# Altium PCB RX.PcbDoc (part 1 of 2)
Units mil, origin at the board's own origin, x right, y up, seen from the top; angles counter-clockwise.
Board outline 2899 x 930 mil, 4 copper layers (Top Layer, Int1 (GND), Int2 (PWR), Bottom Layer), stack 53.912 mil thick; 154 components, 91 nets, 472 pads, 94 vias.
Unrouted connection lines stored in the file: 29.
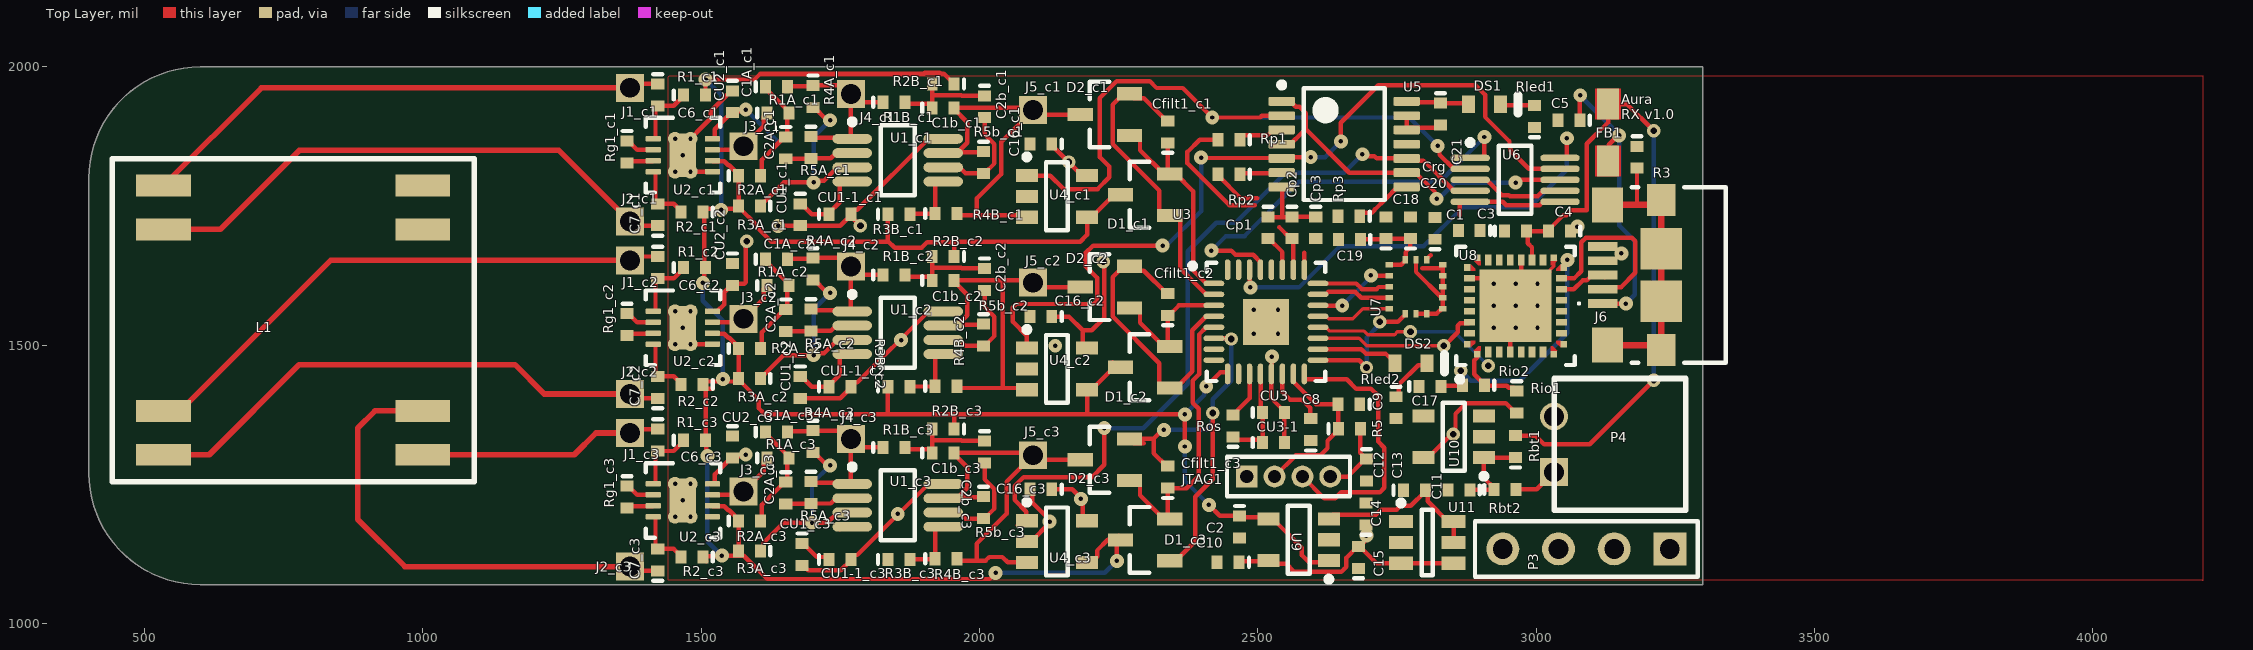
[diagram p0: Top Layer view]
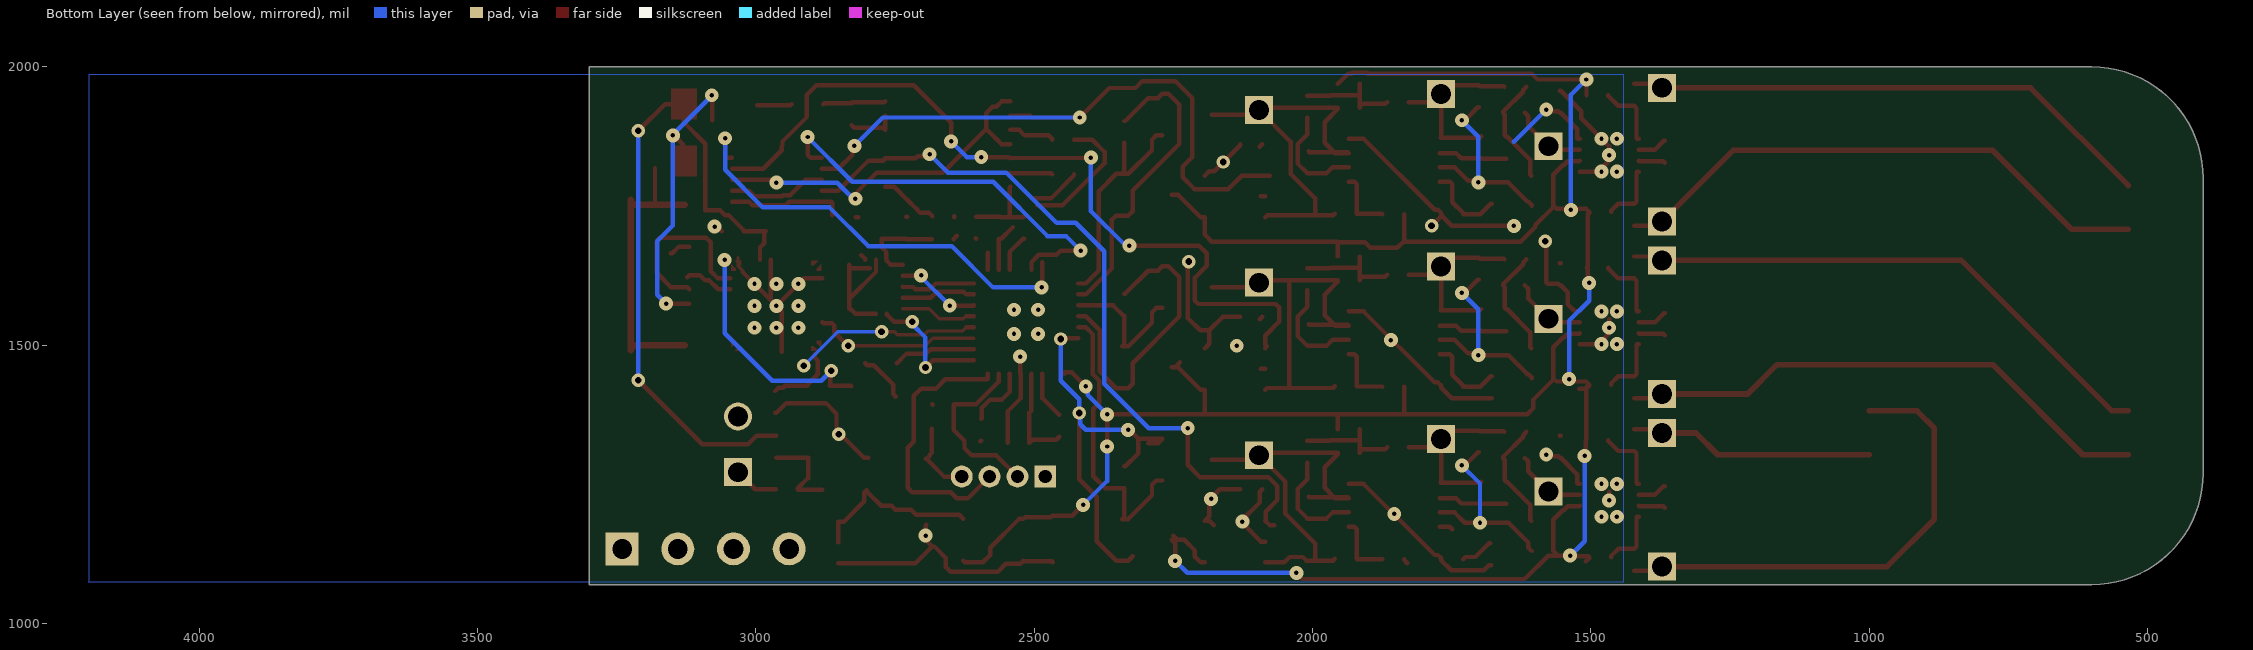
[diagram p1: Bottom Layer view, seen from below]
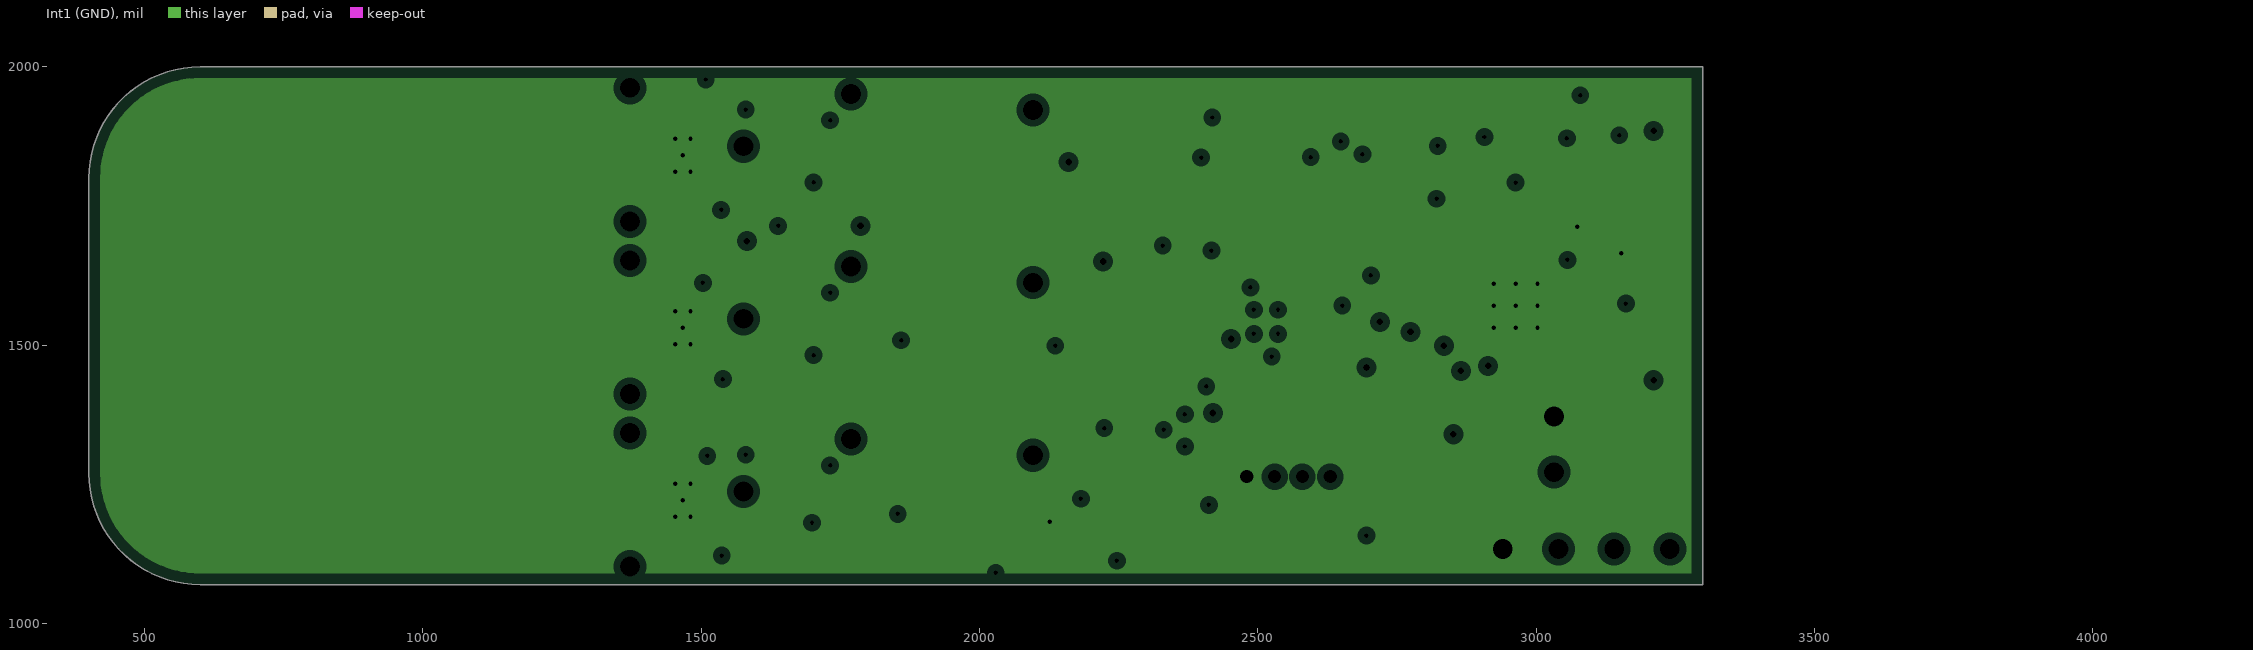
[diagram p2: Int1 (GND), clearances drawn from the general rule]
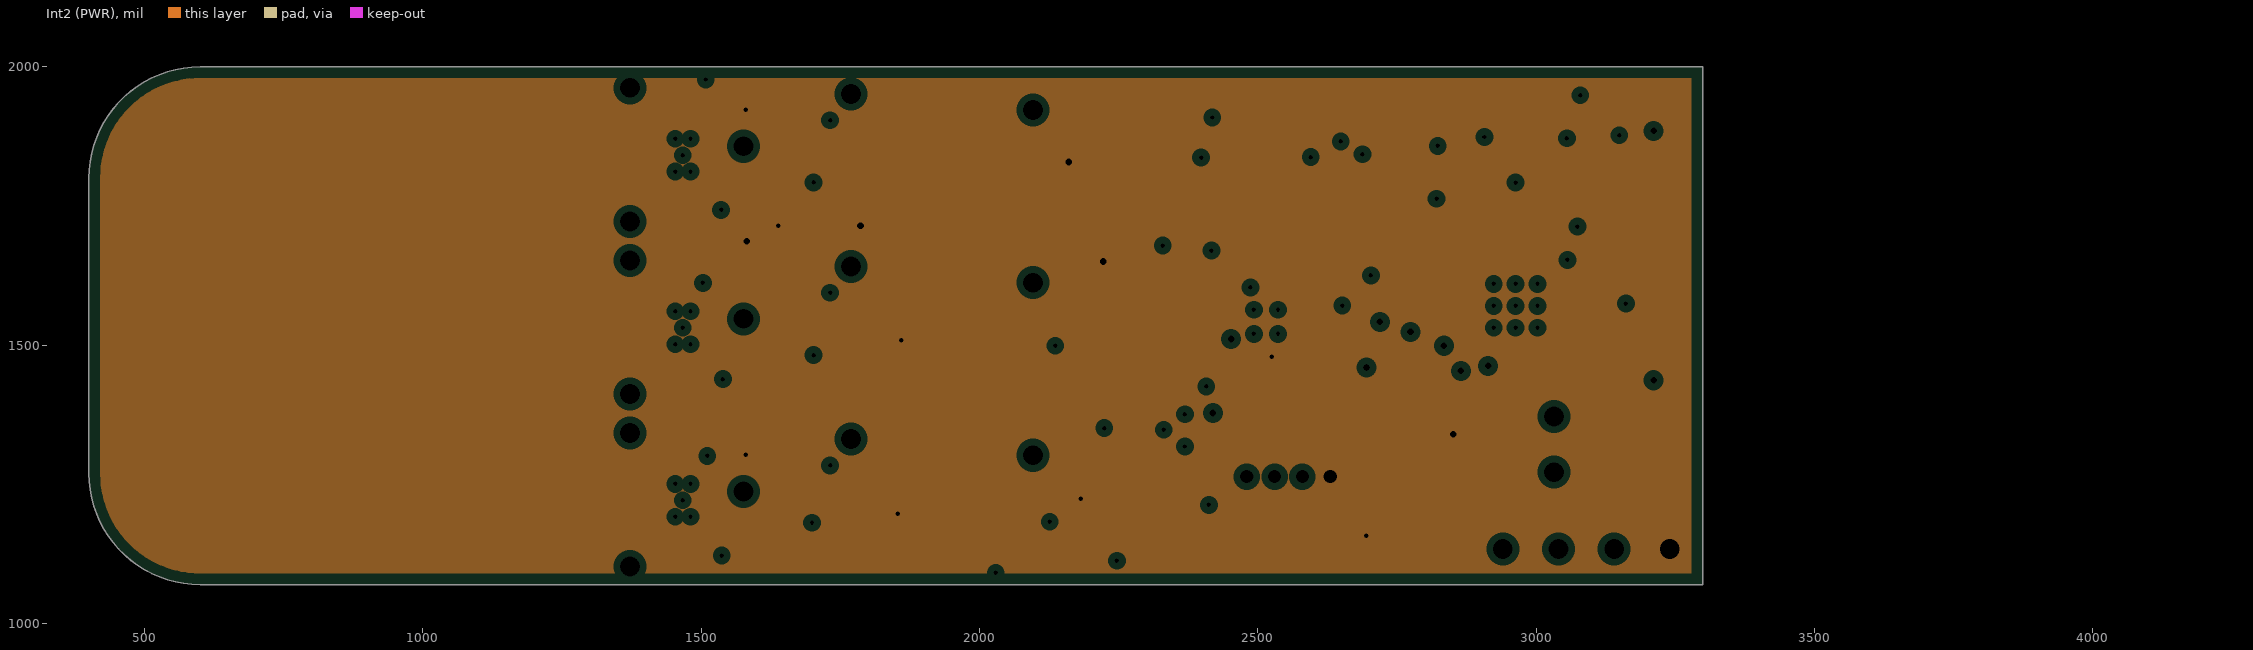
[diagram p3: Int2 (PWR), clearances drawn from the general rule]

## Layer stack, top to bottom
Top Solder: solder mask 1, SM-001, Dk 4
Top Layer: signal copper 1.3779
Dielectric 1: prepreg 5.1, PP-017, Dk 4.3
Dielectric 2: prepreg 5.1, PP-017, Dk 4.3
Int1 (GND): plane copper 1.3779, net GND
Dielectric 3: core 28, Core-039, Dk 4.8
Int2 (PWR): plane copper 1.3779, net VCC
Dielectric 4: prepreg 5.1, PP-017, Dk 4.3
Dielectric 5: prepreg 5.1, PP-017, Dk 4.3
Bottom Layer: signal copper 1.3779
Bottom Solder: solder mask 1, SM-001, Dk 4

## Board outline
600,1070 cw(c600,1270) 400,1270 400,1800 cw(c600,1800) 600,2000 3299,2000 3299,1070

## Design rules (kind name [scope] priority, off if disabled: settings)
Clearance Clearance~FusionPCB [All] p1: gap=8 ignorepadtopadclearanceinfootprint=FALSE except(4: Arc-Arc Arc-Track Arc-SMDPad Arc-THPad Arc-Text Arc-Hole Track-Track Track-SMDPad Track-THPad Track-Text Track-Hole SMDPad-SMDPad SMDPad-THPad SMDPad-Text SMDPad-Hole THPad-THPad THPad-Text THPad-Hole Via-Text Via-Hole Fill-Text Fill-Hole Poly-Text Poly-Hole Region-Text Region-Hole Text-Text Text-Hole) // Sunstone Circuits Minimum Clearance Rule (Double Sided)
HoleSize HoleSize~FusionPCB [All] p1: absolutevalues=TRUE maxlimit=248.03 minlimit=7.87 maxpercent=80.000 minpercent=20.000 // SSC Hole Size Rule For Single Sided & Double Sided Designs.
HoleSize Testpoint [All] p2: absolutevalues=TRUE maxlimit=100 minlimit=1 maxpercent=80.000 minpercent=20.000
HoleSize TestPointUsage [All] p3: absolutevalues=TRUE maxlimit=100 minlimit=1 maxpercent=80.000 minpercent=20.000
MinimumAnnularRing MinimumAnnularRing~FusionPCB [All] p1: minimumring=5 // Sunstone Circuits Minimum Annular Ring (Double Sided)
MinimumSolderMaskSliver [All] p1: minsoldermaskwidth=4
PlaneClearance "PlaneClearance~Sunstone Circuits" [All] p1: clearance=12 // Sunstone Circuits Power Plane Clearance Rule (Double Sided)
PlaneConnect "PlaneConnect~Sunstone Circuits" [All] p1: planeconnectstyle=Relief reliefexpansion=10 reliefentries=4 reliefconductorwidth=8 reliefairgap=10 // Sunstone Circuits Power Plane Connect Rule (Double Sided)
PolygonConnect "PolygonConnect~Sunstone Circuits" [All] p1: connectstyle=Relief reliefconductorwidth=8 reliefentries=4 polygonreliefangle="90 Angle" airgapwidth=10 // Sunstone Circuits Polygon Connect Style (Double Sided)
RoomDefinition c2 [InComponentClass('c2')] p1: confinementstyle=ConfineIn formatcopy=TRUE lockcomponents=FALSE outline 1340,1380 2382,1380 2382,1690 1340,1690
RoomDefinition c3 [InComponentClass('c3')] p2: confinementstyle=ConfineIn formatcopy=TRUE lockcomponents=FALSE outline 1340,1071 2382,1071 2382,1380 1340,1380
RoomDefinition c1 [InComponentClass('c1')] p3: confinementstyle=ConfineIn formatcopy=TRUE lockcomponents=FALSE outline 1340,1690 2382,1690 2382,2000 1340,2000
RoutingVias RoutingVias~FusionPCB [All] p1: holewidth=12 width=24 viastyle="Through Hole" minholewidth=12 minwidth=24 maxholewidth=20 maxwidth=40 // Sunstone Circuits Routing Vias Rule (Double Sided)
ShortCircuit "ShortCircuit~Sunstone Circuits" [All] p1: allowed=FALSE // Sunstone Circuits Short Circuit Rule~Do Not Allow (Double Sided)
SolderMaskExpansion "SolderMaskExpansion~Sunstone Circuits" [All] p1: expansion=3 // Sunstone Circuits Solder Mask Expansion Rule (Double Sided)
ViasUnderSMD "ViasUnderSMD~Sunstone Circuits" [All] p1: allowed=FALSE // Sunstone Circuits Vias Under SMD~Do Not Allow (Double Sided)
Width Width~FusionPCB [All] p1: maxlimit=8 minlimit=6 preferedwidth=8 minimp=50.000000 maximp=50.000000 favimp=50.000000 // Sunstone Circuits Minimum Width Rule (Double Sided)
25 further rules are at their usual default settings.

## Classes and differential pairs
component class U_ble: P3
component class U_usb: C3 C4 C5 C17 FB1 R3 Rio1 Rio2 U8
component class U_power: C2 C10 C11 C12 C13 C14 C15 DS1 P4 Rbt1 Rbt2 Rled1 U9 U10 U11
component class U_mcu: C8 C9 Cp1 Cp2 Cp3 CU3 CU3-1 DS2 JTAG1 R5 Rled2 Ros Rp1 Rp2 Rp3 U3
component class U_imu: C18 C19 C20 Crg U7
component class U_coil_processing: C1 C21 L1 U5 U6
component class c1: C1A_c1 C1b_c1 C2A_c1 C2b_c1 C5_c1 C6_c1 C7_c1 C16_c1 Cbp1_c1 Cfilt1_c1 CU1-1_c1 CU1_c1 CU2_c1 D1_c1 D2_c1 J1_c1 J2_c1 J3_c1 J4_c1 J5_c1 R1_c1 R1A_c1 R1B_c1 R2_c1 R2A_c1 R2B_c1 R3A_c1 R3B_c1 R4A_c1 R4B_c1 R5A_c1 R5b_c1 Rbp1_c1 Rbp2_c1 Rbp7_c1 Rg1_c1 Rxor2_c1 U1_c1 U2_c1 U4_c1
component class c2: C1A_c2 C1b_c2 C2A_c2 C2b_c2 C5_c2 C6_c2 C7_c2 C16_c2 Cbp1_c2 Cfilt1_c2 CU1-1_c2 CU1_c2 CU2_c2 D1_c2 D2_c2 J1_c2 J2_c2 J3_c2 J4_c2 J5_c2 R1_c2 R1A_c2 R1B_c2 R2_c2 R2A_c2 R2B_c2 R3A_c2 R3B_c2 R4A_c2 R4B_c2 R5A_c2 R5b_c2 Rbp1_c2 Rbp2_c2 Rbp7_c2 Rg1_c2 Rxor2_c2 U1_c2 U2_c2 U4_c2
component class c3: C1A_c3 C1b_c3 C2A_c3 C2b_c3 C5_c3 C6_c3 C7_c3 C16_c3 Cbp1_c3 Cfilt1_c3 CU1-1_c3 CU1_c3 CU2_c3 D1_c3 D2_c3 J1_c3 J2_c3 J3_c3 J4_c3 J5_c3 R1_c3 R1A_c3 R1B_c3 R2_c3 R2A_c3 R2B_c3 R3A_c3 R3B_c3 R4A_c3 R4B_c3 R5A_c3 R5b_c3 Rbp1_c3 Rbp2_c3 Rbp7_c3 Rg1_c3 Rxor2_c3 U1_c3 U2_c3 U4_c3
channel class coils: c1 c2 c3

## Components (designator, comment, footprint, x,y, rotation, side; value= is the part's Value field where it differs from the comment)
C1 "Cap" 0402 2879.69,1706 r180 top value=0.1uF
C1A_c1 "Cap" 0402 1635.31,1964.32 r0 top value=180p (schematic designator C1A)
C1A_c2 "Cap" 0402 1635.31,1654.32 r0 top value=180p (schematic designator C1A)
C1A_c3 "Cap" 0402 1635.31,1344.32 r0 top value=180p (schematic designator C1A)
C1b_c1 "Cap" 0402 1934.69,1926.32 r0 top value=160p (schematic designator C1b)
C1b_c2 "Cap" 0402 1934.69,1616.32 r0 top value=160p (schematic designator C1b)
C1b_c3 "Cap" 0402 1934.69,1306.32 r0 top value=160p (schematic designator C1b)
C2 "Cap" 0402 2467,1173.69 r270 top value=0.1uF
C2A_c1 "Cap" 0402 1652,1854.63 r270 top value=180p (schematic designator C2A)
C2A_c2 "Cap" 0402 1652,1544.63 r270 top value=180p (schematic designator C2A)
C2A_c3 "Cap" 0402 1652,1234.63 r270 top value=180p (schematic designator C2A)
C2b_c1 "Cap" 0402 2009,1928.32 r270 top value=160p (schematic designator C2b)
C2b_c2 "Cap" 0402 2009,1618.32 r270 top value=160p (schematic designator C2b)
C2b_c3 "Cap" 0402 2009,1308.32 r270 top value=160p (schematic designator C2b)
C3 "Cap" 0402 2962.68,1705 r0 top value=100nF
C4 "Cap" 0402 3041.69,1705 r180 top value=4.7uF
C5 "Cap" 0402 3058.69,1904.06 r180 top value=10uF
C6_c1 "Cap" 0402 1422,1949.63 r270 top value=1nF (schematic designator C6)
C6_c2 "Cap" 0402 1422,1639.63 r270 top value=1nF (schematic designator C6)
C6_c3 "Cap" 0402 1422,1329.63 r270 top value=1nF (schematic designator C6)
C7_c1 "Cap" 0402 1422,1734.32 r90 top value=1nF (schematic designator C7)
C7_c2 "Cap" 0402 1422,1424.32 r90 top value=1nF (schematic designator C7)
C7_c3 "Cap" 0402 1422,1114.32 r90 top value=1nF (schematic designator C7)
C8 "Cap" 0402 2595,1348.31 r90 top value=470nF
C9 "Cap" 0402 2663.32,1394 r180 top value=1nF
C10 "Cap" 0402 2446.55,1110 r180 top value=0.1uF
C11 "Cap" 0402 2861,1240 r180 top value=1uF
C12 "Cap" 0402 2695,1276 r270 top value=1uF
C13 "Cap" 0402 2781,1239.31 r0 top value=0.1uF
C14 "Cap" 0402 2694,1197 r90 top value=1uF
C15 "Cap" 0402 2681,1118.68 r90 top value=0.1uF
C16_c1 "Cap" 0402 2110,1861.32 r180 top value=0.1uF (schematic designator C16)
C16_c2 "Cap" 0402 2110,1551.32 r180 top value=0.1uF (schematic designator C16)
C16_c3 "Cap" 0402 2110,1241.32 r180 top value=0.1uF (schematic designator C16)
C17 "Cap" 0402 2809,1426 r0 top value=100nF
C18 "Cap" 0402 2730,1711 r90 top value=0.1uF
C19 "Cap" 0402 2664.32,1690 r180 top value=2.2uF
C20 "Cap" 0402 2774,1711 r90 top value=.01uF
C21 "Cap" 0402 2828,1915 r270 top value=0.1uF
Cfilt1_c1 "Cap" 0402 2338,1883 r90 top value=470pF (schematic designator Cfilt1)
Cfilt1_c2 "Cap" 0402 2338,1573 r90 top value=470pF (schematic designator Cfilt1)
Cfilt1_c3 "Cap" 0402 2338,1263 r90 top value=470pF (schematic designator Cfilt1)
Cp1 "Cap" 0402 2518,1711 r270 top value=100pF
Cp2 "Cap" 0402 2561,1711 r270 top value=100pF
Cp3 "Cap" 0402 2604,1711 r270 top value=100pF
Crg "Cap" 0402 2818.11,1710 r90 top value=0.1uF
CU1-1_c1 "Cap" 0402 1749,1735.32 r0 top value=10uF (schematic designator CU1-1)
CU1-1_c2 "Cap" 0402 1749,1425.32 r0 top value=10uF (schematic designator CU1-1)
CU1-1_c3 "Cap" 0402 1749,1115.32 r0 top value=10uF (schematic designator CU1-1)
CU1_c1 "Cap" 0402 1678,1734.32 r270 top value=0.1uF (schematic designator CU1)
CU1_c2 "Cap" 0402 1678,1424.32 r270 top value=0.1uF (schematic designator CU1)
CU1_c3 "Cap" 0402 1681,1124.32 r270 top value=0.1uF (schematic designator CU1)
CU2_c1 "Cap" 0402 1556,1937.32 r270 top value=0.1uF (schematic designator CU2)
CU2_c2 "Cap" 0402 1556,1627.32 r270 top value=0.1uF (schematic designator CU2)
CU2_c3 "Cap" 0402 1556,1317.32 r270 top value=0.1uF (schematic designator CU2)
CU3 "Cap" 0402 2528,1379 r0 top value=0.1uF
CU3-1 "Cap" 0402 2528,1325 r0 top value=10uF
D1_c1 "SMS7630-006LF" SOT23-3N 2345.45,1537.27 r180 top (schematic designator D1)
D1_c2 "SMS7630-006LF" SOT23-3N 2345.45,1227.27 r180 top (schematic designator D1)
D1_c3 "SMS7630-006LF" SOT23-3N 2345.45,917.27 r180 top (schematic designator D1)
D2_c1 "SMS7630-005LF" SOT23-3N 2273.45,1681.27 r180 top (schematic designator D2)
D2_c2 "SMS7630-005LF" SOT23-3N 2273.45,1371.27 r180 top (schematic designator D2)
D2_c3 "SMS7630-005LF" SOT23-3N 2273.45,1061.27 r180 top (schematic designator D2)
DS1 "TLMS1100-GS08" VISH-TLMX1100_V 2907,1933 r0 top
DS2 "TLMS1100-GS08" VISH-TLMX1100_V 2775,1467.79 r0 top
FB1 "BLM21PG300SN1D" MURA-BLM21-B40-CHIP-2_V2 3129,1882 r270 top
J1_c1 "Socket" pin1 1372,1962.32 r0 top (schematic designator J1)
J1_c2 "Socket" pin1 1372,1652.32 r0 top (schematic designator J1)
J1_c3 "Socket" pin1 1372,1342.32 r0 top (schematic designator J1)
J2_c1 "Socket" pin1 1372,1722.32 r0 top (schematic designator J2)
J2_c2 "Socket" pin1 1372,1412.32 r0 top (schematic designator J2)
J2_c3 "Socket" pin1 1372,1102.32 r0 top (schematic designator J2)
J3_c1 "Socket" pin1 1576,1857.32 r0 top (schematic designator J3)
J3_c2 "Socket" pin1 1576,1547.32 r0 top (schematic designator J3)
J3_c3 "Socket" pin1 1576,1237.32 r0 top (schematic designator J3)
J4_c1 "Socket" pin1 1769,1951.32 r0 top (schematic designator J4)
J4_c2 "Socket" pin1 1769,1641.32 r0 top (schematic designator J4)
J4_c3 "Socket" pin1 1769,1331.32 r0 top (schematic designator J4)
J5_c1 "Socket" pin1 2096,1922.32 r0 top (schematic designator J5)
J5_c2 "Socket" pin1 2096,1612.32 r0 top (schematic designator J5)
J5_c3 "Socket" pin1 2096,1302.32 r0 top (schematic designator J5)
J6 "1981568-1" TECO-1981568-5_V 3119.14,1626.02 r90 top
JTAG1 "MHDR1X4" MHDR1X4 2480,1264 r0 top
L1 "3DCC08-A" 3DCC08-A 767,1545 r90 top
P3 "Header 4" HDR1X4 3240,1134 r180 top
P4 "JST-PH-small" JST-PH-small 3032,1322 r0 top
R1_c1 "Res" 0402 1488,1949.32 r0 top value=332k (schematic designator R1)
R1_c2 "Res" 0402 1488,1639.32 r0 top value=332k (schematic designator R1)
R1_c3 "Res" 0402 1488,1329.32 r0 top value=332k (schematic designator R1)
R1A_c1 "Res" 0402 1638,1917.32 r0 top value=16.5k (schematic designator R1A)
R1A_c2 "Res" 0402 1638,1607.32 r0 top value=16.5k (schematic designator R1A)
R1A_c3 "Res" 0402 1638,1297.32 r0 top value=16.5k (schematic designator R1A)
R1B_c1 "Res" 0402 1846.31,1936.32 r0 top value=24.9K (schematic designator R1B)
R1B_c2 "Res" 0402 1846.31,1626.32 r0 top value=24.9K (schematic designator R1B)
R1B_c3 "Res" 0402 1846.31,1316.32 r0 top value=24.9K (schematic designator R1B)
R2_c1 "Res" 0402 1483.32,1739.32 r180 top value=332k (schematic designator R2)
R2_c2 "Res" 0402 1483.32,1429.32 r180 top value=332k (schematic designator R2)
R2_c3 "Res" 0402 1483.32,1119.32 r180 top value=332k (schematic designator R2)
R2A_c1 "Res" 0402 1587,1804.32 r0 top value=866 (schematic designator R2A)
R2A_c2 "Res" 0402 1587,1494.32 r0 top value=866 (schematic designator R2A)
R2A_c3 "Res" 0402 1587,1184.32 r0 top value=866 (schematic designator R2A)
R2B_c1 "Res" 0402 1934.69,1969.32 r180 top value=1.05K (schematic designator R2B)
R2B_c2 "Res" 0402 1934.69,1659.32 r180 top value=1.05K (schematic designator R2B)
R2B_c3 "Res" 0402 1934.69,1349.32 r180 top value=1.05K (schematic designator R2B)
R3 "Res" 0402 3181,1837.63 r270 top value=DNC
R3A_c1 "Res" 0402 1586.69,1750.32 r180 top value=316 (schematic designator R3A)
R3A_c2 "Res" 0402 1586.69,1440.32 r180 top value=316 (schematic designator R3A)
R3A_c3 "Res" 0402 1586.69,1130.32 r180 top value=316 (schematic designator R3A)
R3B_c1 "Res" 0402 1855,1735.32 r0 top value=191 (schematic designator R3B)
R3B_c2 "Res" 0402 1855,1425.32 r0 top value=191 (schematic designator R3B)
R3B_c3 "Res" 0402 1855,1115.32 r0 top value=191 (schematic designator R3B)
R4A_c1 "Res" 0402 1701,1947 r270 top value=18.2k (schematic designator R4A)
R4A_c2 "Res" 0402 1701,1637 r270 top value=18.2k (schematic designator R4A)
R4A_c3 "Res" 0402 1701,1327 r270 top value=18.2k (schematic designator R4A)
R4B_c1 "Res" 0402 1940,1736.32 r0 top value=11K (schematic designator R4B)
R4B_c2 "Res" 0402 1940,1426.32 r0 top value=11K (schematic designator R4B)
R4B_c3 "Res" 0402 1940,1116.32 r0 top value=11K (schematic designator R4B)
R5 "Res" 0402 2664.32,1350 r0 top value=47k
R5A_c1 "Res" 0402 1697,1855.32 r270 top value=82.5k (schematic designator R5A)
R5A_c2 "Res" 0402 1697,1545.32 r270 top value=82.5k (schematic designator R5A)
R5A_c3 "Res" 0402 1697,1235.32 r270 top value=82.5k (schematic designator R5A)
R5b_c1 "Res" 0402 2007,1828.32 r270 top value=100K (schematic designator R5b)
R5b_c2 "Res" 0402 2007,1518.32 r270 top value=100K (schematic designator R5b)
R5b_c3 "Res" 0402 2007,1208.32 r270 top value=100K (schematic designator R5b)
Rbt1 "Res" 0402 2963,1317.68 r90 top value=0
Rbt2 "Res" 0402 2944,1241 r0 top value=DNP
Rg1_c1 "Res" 0402 1367,1847.32 r270 top value=1k (schematic designator Rg1)
Rg1_c2 "Res" 0402 1367,1537.32 r270 top value=1k (schematic designator Rg1)
Rg1_c3 "Res" 0402 1367,1227.32 r270 top value=1k (schematic designator Rg1)
Rio1 "Res" 0402 2965,1398 r270 top value=0
Rio2 "Res" 0402 2887,1428 r180 top value=DNP
Rled1 "Res" 0402 2997,1911 r90 top value=60
Rled2 "Res" 0402 2748.28,1387.69 r270 top value=60
Ros "Res" 0402 2455,1355 r90 top value=20k
Rp1 "Res" 0402 2448,1869 r180 top value=1k
Rp2 "Res" 0402 2448,1807 r180 top value=1k
Rp3 "Res" 0402 2663.32,1731.63 r180 top value=1k
U1_c1 "AD8616ARMZ" ADI-RM-8_N 1853,1832.32 r0 top (schematic designator U1)
U1_c2 "AD8616ARMZ" ADI-RM-8_N 1853,1522.32 r0 top (schematic designator U1)
U1_c3 "AD8616ARMZ" ADI-RM-8_N 1853,1212.32 r0 top (schematic designator U1)
U2_c1 "INA826AIDRGT" DRG0008A_V 1467,1841.32 r0 top (schematic designator U2)
U2_c2 "INA826AIDRGT" DRG0008A_V 1467,1531.32 r0 top (schematic designator U2)
U2_c3 "INA826AIDRGT" DRG0008A_V 1467,1221.32 r0 top (schematic designator U2)
U3 "MSP430I2031TRHB" QFN50P500X500X100_HS-33N 2514.5,1541.95 r0 top
U4_c1 "TLV3201-Q1" SOT95P280X145-5N 2139,1767.32 r0 top (schematic designator U4)
U4_c2 "TLV3201-Q1" SOT95P280X145-5N 2139,1457.32 r0 top (schematic designator U4)
U4_c3 "TLV3201-Q1" SOT95P280X145-5N 2139,1147.32 r0 top (schematic designator U4)
U5 "SN74LV86APWR" PW0014A_L 2655,1861.16 r0 top
U6 "ADG704BRMZ" ADI-RM-10_N 2962,1797 r0 top
U7 "ICM-20602" INSE-I62-16 2784,1605 r0 top
U8 "FT232RQ-Reel" PQFN5X5-32_V 2962.9,1570.67 r90 top
U9 "ADA4084-1ARJZ-R7" SOT95P280X145-5N 2573.24,1150.52 r180 top
U10 "TPS70933" SOT95P280X145-5N 2851.87,1335.4 r180 top
U11 "ADR3412ARJZ-R2" ADI-RJ-6_N 2804.24,1145.6 r0 top

## Footprints (in the part's own frame and the unit in brackets; to place one, negate y for a bottom-side part, rotate by r counter-clockwise, add the part's x,y. Pads: shape width x height; smd on the part's side, far side on the other; paste and mask are expansions set on the pad)
3DCC08-A [mm] "premo coil"
  rect 1x2.5 smd: 1(6.14,5.91) 2(4.14,5.91) 3(-4.14,5.91) 4(-6.14,5.91) 5(-6.14,-5.91) 6(-4.14,-5.91) 7(4.14,-5.91) 8(6.14,-5.91)
  silkscreen extent -7.37,-8.25 7.37,8.25
0402 [mm] "Surface Mount; Body 1 x 0.5 mm (LxW typ)"
  rect 0.5x0.6 smd: 1(-0.5,0) 2(0.5,0)
  silkscreen extent -0.95,-0.2 -0.95,0.2, body extent -0.5,-0.25 0.5,0.25, height 0.5
ADI-RJ-6_N [mm] "SOT23, 6-Leads, Body 2.9x1.6mm, Pitch 0.95mm, IPC Medium Density"
  rect 1.1x0.6 smd: 1(-1.2,0.95) 2(-1.2,0) 3(-1.2,-0.95) 4(1.2,-0.95) 5(1.2,0) 6(1.2,0.95)
  silkscreen extent -1.32,-1.5 0.25,1.92, body extent -0.85,-1.5 0.85,1.5, height 1.45
ADI-RM-8_N [mm] "SOP, 8-Leads, Body 3x3mm, Pitch 0.65mm, IPC Medium Density"
  oval 1.8x0.45 smd: 1(-2.075,0.975) 2(-2.075,0.325) 3(-2.075,-0.325) 4(-2.075,-0.975) 5(2.075,-0.975) 6(2.075,-0.325) 7(2.075,0.325) 8(2.075,0.975)
  silkscreen extent -2.2,-1.6 0.77,1.87, body extent -1.6,-1.6 1.6,1.6, height 1.1
ADI-RM-10_N [mm] "SOP, 10-Leads, Body 3x3mm, Pitch 0.5mm, IPC Medium Density"
  oval 1.8x0.3 smd: 1(-2.05,1) 2(-2.05,0.5) 3(-2.05,0) 4(-2.05,-0.5) 5(-2.05,-1) 6(2.05,-1) 7(2.05,-0.5) 8(2.05,0) 9(2.05,0.5) 10(2.05,1)
  silkscreen extent -2.17,-1.55 0.75,1.82, body extent -1.55,-1.55 1.55,1.55, height 1.1
DRG0008A_V [mm] "SON, 8-Leads, Body 3x3mm, Pitch 0.5mm, Thermal Pad 2x1.2mm, TI Recommended"
  rrect40% 0.7x0.25 smd: 1(-1.35,0.75) 2(-1.35,0.25) 3(-1.35,-0.25) 4(-1.35,-0.75) 5(1.35,-0.75) 6(1.35,-0.25) 7(1.35,0.25) 8(1.35,0.75)
  rrect8% 1.2x2 smd paste-0.6: 9(0,0)
  Drill Guide keep-out region: 0.6,-1 -0.6,-1 -0.6,-1.3 0.6,-1.3
  Drill Guide keep-out region: -0.6,1 0.6,1 0.6,1.3 -0.6,1.3
  silkscreen extent -1.7,-1.7 1.7,1.7, body extent -1.55,-1.55 1.55,1.55, height 0.81
HDR1X4 [mm] "Connector; Header; 4 Position"
  rect 1.5x1.5 hole 0.9: 1(0,0)
  round 1.5 hole 0.9: 2(2.54,0) 3(5.08,0) 4(7.62,0)
  silkscreen extent -1.27,-1.27 8.89,1.27
INSE-I62-16 [mm] "LGA, 16-Leads, Body 3x3mm, Pitch 0.5mm"
  rect 0.35x0.25 smd: 1(-1.225,1) 2(-1.225,0.5) 3(-1.225,0) 4(-1.225,-0.5) 5(-1.225,-1) 9(1.225,-1) 10(1.225,-0.5) 11(1.225,0) 12(1.225,0.5) 13(1.225,1)
  rect 0.25x0.35 smd: 6(-0.5,-1.225) 7(0,-1.225) 8(0.5,-1.225) 14(0.5,1.225) 15(0,1.225) 16(-0.5,1.225)
  body extent -1.5,-1.5 1.5,1.5, height 0.8
JST-PH-small [mm]
  rect 1.271x1.271 hole 0.9: 1(0,-1.27)
  oval 1.271x1.271 hole 0.9: 2(0,1.27)
  silkscreen extent 0,-3 6,3
MHDR1X4 [mm] "Connector; Header; 4 Position"
  rect 1x1 hole 0.6: 1(0,0)
  round 1 hole 0.6: 2(1.27,0) 3(2.54,0) 4(3.81,0)
  silkscreen extent -0.9,-0.9 4.71,0.9
MURA-BLM21-B40-CHIP-2_V2 [mm] "Chip Ferrite Bead, 2-Leads, Body 2x1.25mm, Height 1.05mm, 35um Land Pad Thickness, 3 to 4A Rated Current"
  rect 1.4x1 smd mask+0: 1(-1.3,0) 2(1.3,0)
  Top Layer region: -2,-0.599 -0.6,-0.599 -0.6,0.601 -2,0.601
  Top Layer region: 0.6,-0.599 2,-0.599 2,0.601 0.6,0.601
  body extent -1,-0.63 1,0.63, height 1.05
pin1 [mm]
  rect 1.271x1.271 hole 0.9: 1(0,0)
PQFN5X5-32_V [mm] "QFN, 32-Leads, Body 5x5mm, Pitch 0.5mm, Thermal Pad 3.3x3.3mm, FTDI Recommended"
  rect 0.3x0.3 smd paste-0.15 mask-0.15: 1(-2.2,1.75) 8(-2.2,-1.75) 9(-1.75,-2.2) 16(1.75,-2.2) 17(2.2,-1.75) 24(2.2,1.75) 25(1.75,2.2) 32(-1.75,2.2)
  rect 0.5x0.3 smd paste-0.15 mask+0.06: 2(-2.1,1.25) 3(-2.1,0.75) 4(-2.1,0.25) 5(-2.1,-0.25) 6(-2.1,-0.75) 7(-2.1,-1.25) 18(2.1,-1.25) 19(2.1,-0.75) 20(2.1,-0.25) 21(2.1,0.25) 22(2.1,0.75) 23(2.1,1.25)
  rect 0.3x0.5 smd paste-0.15 mask+0.06: 10(-1.25,-2.1) 11(-0.75,-2.1) 12(-0.25,-2.1) 13(0.25,-2.1) 14(0.75,-2.1) 15(1.25,-2.1) 26(1.25,2.1) 27(0.75,2.1) 28(0.25,2.1) 29(-0.25,2.1) 30(-0.75,2.1) 31(-1.25,2.1)
  rect 3.3x3.3 smd paste-1.65 mask+0.06: 33(0,0)
  Top Layer region: -2.05,-1.6 -1.85,-1.6 -1.85,-1.7 -2.05,-1.9
  Top Layer region: 2.05,-1.6 1.85,-1.6 1.85,-1.7 2.05,-1.9
  Top Layer region: 2.05,1.6 1.85,1.6 1.85,1.7 2.05,1.9
  Top Layer region: -2.05,1.6 -1.85,1.6 -1.85,1.7 -2.05,1.9
  Top Layer region: -1.6,-2.05 -1.6,-1.85 -1.7,-1.85 -1.9,-2.05
  Top Layer region: 1.6,2.05 1.6,1.85 1.7,1.85 1.9,2.05
  Top Layer region: -1.6,2.05 -1.6,1.85 -1.7,1.85 -1.9,2.05
  Top Layer region: 1.6,-1.85 1.6,-2.05 1.9,-2.05 1.7,-1.85
  silkscreen extent -3.47,-2.7 2.7,2.7, body extent -2.55,-2.55 2.55,2.55, height 1
PW0014A_L [mm] "SOP, 14-Leads, Body 5.1x4.5mm, Pitch 0.65mm, IPC High Density"
  rrect25% 1.2x0.4 smd: 1(-2.85,1.95) 2(-2.85,1.3) 3(-2.85,0.65) 4(-2.85,0) 5(-2.85,-0.65) 6(-2.85,-1.3) 7(-2.85,-1.95) 8(2.85,-1.95) 9(2.85,-1.3) 10(2.85,-0.65) 11(2.85,0) 12(2.85,0.65) 13(2.85,1.3) 14(2.85,1.95)
  silkscreen extent -2.97,-2.55 1.85,2.82, body extent -3.21,-2.5 3.21,2.5, height 1
QFN50P500X500X100_HS-33N [mm] "QFN, 32-Leads, Body 5.00x5.00mm, Pitch 0.50mm, Thermal Pad 2.10x2.10mm, IPC Medium Density"
  oval 0.95x0.25 smd: 1(-2.375,1.75) 2(-2.375,1.25) 3(-2.375,0.75) 4(-2.375,0.25) 5(-2.375,-0.25) 6(-2.375,-0.75) 7(-2.375,-1.25) 8(-2.375,-1.75) 17(2.375,-1.75) 18(2.375,-1.25) 19(2.375,-0.75) 20(2.375,-0.25) 21(2.375,0.25) 22(2.375,0.75) 23(2.375,1.25) 24(2.375,1.75)
  oval 0.25x0.95 smd: 9(-1.75,-2.375) 10(-1.25,-2.375) 11(-0.75,-2.375) 12(-0.25,-2.375) 13(0.25,-2.375) 14(0.75,-2.375) 15(1.25,-2.375) 16(1.75,-2.375) 25(1.75,2.375) 26(1.25,2.375) 27(0.75,2.375) 28(0.25,2.375) 29(-0.25,2.375) 30(-0.75,2.375) 31(-1.25,2.375) 32(-1.75,2.375)
  rect 2.1x2.1 smd: 33(0,0)
  silkscreen extent -3.47,-2.7 2.7,2.7, body extent -2.6,-2.6 2.6,2.6, height 1
SOT23-3N [mm] "SMS7621"
  rect 1.15x0.6 smd: 1(0.098,-4.969) 2(0.098,-6.869) 3(2.348,-5.919)
  silkscreen extent 1.02,-7.42 1.92,-4.42, body extent 0.52,-7.42 1.92,-4.42, height 1.1
SOT95P280X145-5N [mm] "SOT23, 5-Leads, Body 2.90x2.80mm, Pitch 0.95mm, IPC Medium Density"
  rect 1x0.6 smd: 1(-1.375,0.95) 2(-1.375,0) 3(-1.375,-0.95) 4(1.375,-0.95) 5(1.375,0.95)
  silkscreen extent -1.5,-1.55 0.5,1.92, body extent -1.5,-1.53 1.5,1.53, height 1.45
TECO-1981568-5_V [mm] "SMD, 5-Leads, Body 8x5.9mm, Pitch 0.65mm"
  rect 0.4x1.35 smd: 1(-1.3,0) 2(-0.65,0) 3(0,0) 4(0.65,0) 5(1.3,0)
  rect 1.6x1.4 smd: 6(-3.2,-0.225) 7(3.2,-0.225)
  rect 1.45x1.3 smd: 8(-3.425,-2.675) 9(3.425,-2.675)
  rect 1.9x1.9 smd: 10(-1.2,-2.675) 11(1.2,-2.675)
  silkscreen extent -4,-5.63 4,1.12, body extent -4,-5.63 4,0.28, height 3
VISH-TLMX1100_V [mm] "SMD, 2-Leads, Body 1.6x0.8mm"
  rect 0.6x0.8 smd: 1(-0.725,0) 2(0.725,0)
  silkscreen extent 1.53,-0.4 1.53,0.4, body extent -0.8,-0.4 0.8,0.4, height 0.65

## Part data
C1 C1A_c1 C1A_c2 C1A_c3 C1b_c1 C1b_c2 C1b_c3 C2 C2A_c1 C2A_c2 C2A_c3 C2b_c1 C2b_c2 C2b_c3 C3 C4 C5 C6_c1 C6_c2 C6_c3 C7_c1 C7_c2 C7_c3 C8 C9 C10 C11 C12 C13 C14 C15 C16_c1 C16_c2 C16_c3 C17 C18 C19 C20 C21 Cfilt1_c1 Cfilt1_c2 Cfilt1_c3 Cp1 Cp2 Cp3 Crg CU1-1_c1 CU1-1_c2 CU1-1_c3 CU1_c1 CU1_c2 CU1_c3 CU2_c1 CU2_c2 CU2_c3 CU3 CU3-1: "Ceramic Capacitor (Surface Mount)", Manufacturer="Generic Ceramic Chip Cap (TBD)"
D1_c1 D1_c2 D1_c3: library part SMS7621-006LF, Supplier Part Number 1=863-1124-6-ND, Supplier 1=Digi-Key
D2_c1 D2_c2 D2_c3: library part SMS7621-005LF, Supplier Part Number 1=863-1699-6-ND, Supplier 1=Digi-Key
DS1 DS2: library part CMP-1666-00027-1, "LED, RED, 2.1 V, -40 to 100 degC, 2-Pin SMD (0603), RoHS, Tape and Reel", Capacitance="12 pF", Case/Package=0603, Case Code (Metric)=1608, Max Operating Temperature=125degC, Min Operating Temperature=-55degC, Package Quantity=4000, Resistance="100000000000 Ohm", Tolerance=5%, Type (Capacitors)=C0G, Voltage Rating="50 V", Case Code (Imperial)=0603, ComponentLink1Description="Manufacturer URL", ComponentLink1URL=http://www.vishay.com/, ComponentLink2Description=Datasheet, ComponentLink2URL=http://www.vishay.com/docs/83173/tlmb1100.pdf, DatasheetVersion="Rev. 2.7, 03/2016", Height="0.8 mm", Length="1.6 mm", Mount="Surface Mount", PackageDescription="2-Pin Surface Mount Device, Body 1.6 x 0.8 mm", PackageReference=TLMX1100, Packaging="Tape and Reel", Pins=2, Radiation Hardening=No, REACH SVHC="No SVHC", RoHSCompliant=True, Voltage Rating (DC)="50 V", Width="0.8 mm"
FB1: library part CMP-0686-00620-2, "Chip Ferrite Bead for Power Lines, 30 Ohm, 4000 mA, -55 to 125 degC, 2 x 1.25 x 1.05 mm SMD, Tape and Reel", DC Resistance="0.014 Ohm Max.", Manufacturer=Murata, Operating Temperature Range="-55 to 125 degC", Rated Current="4000 mA", ComponentLink1Description="Manufacturer URL", ComponentLink1URL=http://www.murata.com/, ComponentLink2Description=Datasheet, ComponentLink2URL=http://www.murata.com/products/catalog/pdf/c31e.pdf, ComponentLink3Description="Package Specification", ComponentLink3URL=http://www.murata.com/products/catalog/pdf/c31e.pdf, DatasheetVersion=08/2013, Impedance (at 100 MHz)="30 Ohm Typ.", Mounting Technology="Surface Mount", PackageDescription="2-Pin Chip, Body 2 x 1.25 mm", PackageReference=BLM21_H1050-2, Packing="Tape and Reel", PartNumber=BLM21PG300SN1D
J6: library part CMP-2000-05408-1, "Micro USB Receptacle Standard Type B Assy, 5-Pin SMD, RoHS, Tape and Reel", Current Rating (Max)=1/ContactA, Manufacturer="TE Connectivity", Operating Temperature Max Deg. C=85C, Operating Temperature Min Deg. C=-55C, Operating Temp Range=-55Cto85C, Voltage Rating Max=30VAC, Body Orientation=RightAngle, Contact Material=CopperAlloy, Contact Plating=GoldOverNickel, Datasheet URL=http://www.mouser.com/ds/2/418/NG_CD_1981568_E2-621296.pdf, Datasheet Version="Rev. E2, 08/2015", Gender=RCP, Housing Material=Thermoplastic, Manufacturer URL=http://www.te.com/, Mounting Style=SurfaceMount, Number of Contacts=5POS, Number of Ports=1Port, Number of Terminals=5, Packaging=TapeandReel, Pitch (mm)=0.65mm, Product Depth (mm)=5.6mm, Product Height (mm)=3mm, Product Length (mm)=8mm, Termination Method=Solder, Type=MicroUSB
JTAG1: "Header, 4-Pin", Supplier Part Number 1=ED90528-ND, LatestRevisionDate=17-Jul-2002, LatestRevisionNote="Re-released for DXP Platform.", Publisher="Altium Limited", Supplier 1=Digi-Key
P3: "Header, 4-Pin", LatestRevisionDate=17-Jul-2002, LatestRevisionNote="Re-released for DXP Platform.", Publisher="Altium Limited"
R1_c1 R1_c2 R1_c3 R1A_c1 R1A_c2 R1A_c3 R1B_c1 R1B_c2 R1B_c3 R2_c1 R2_c2 R2_c3 R2A_c1 R2A_c2 R2A_c3 R2B_c1 R2B_c2 R2B_c3 R3 R3A_c1 R3A_c2 R3A_c3 R3B_c1 R3B_c2 R3B_c3 R4A_c1 R4A_c2 R4A_c3 R4B_c1 R4B_c2 R4B_c3 R5 R5A_c1 R5A_c2 R5A_c3 R5b_c1 R5b_c2 R5b_c3 Rbt1 Rbt2 Rg1_c1 Rg1_c2 Rg1_c3 Rio1 Rio2 Rled1 Rled2 Ros Rp1 Rp2 Rp3: "Chip Resistor (Surface Mount)", Manufacturer="Generic Chip Res (TBD)"
U1_c1 U1_c2 U1_c3: library part CMP-0384-01709-1, "Double Channel Wide Bandwidth Operational Amplifier, 24 MHz BW, 12 V/us SR, Industrial, 8-pin SOP (RM-8), Tube", Amplifiers Per Package=2, Generic Part Number=AD8616, Input Bias Current=200fA, Input Offset Voltage=23uV, Manufacturer="Analog Devices", Code_JEDEC=MO-187-AA, ComponentLink1Description="Manufacturer URL", ComponentLink1URL=http://www.analog.com/en/index.html, ComponentLink2Description=Datasheet, ComponentLink2URL=http://www.analog.com/static/imported-files/data_sheets/AD8615_8616_8618.pdf, ComponentLink3Description="Package Specification", ComponentLink3URL=http://www.analog.com/static/imported-files/packages/PKG_PDF/MSOP%28RM%29/RM_8.pdf, DatasheetVersion="Rev. E", Iq/Amp=2mA, Mounting Technology="Surface Mount", PackageDescription="8-Pin Mini Small Outline Package, Body 3 x 3 mm, Pitch 0.65 mm", PackageReference=RM-8, PartId=1, PartNumber=AD8616ARMZ, Slew Rate=12V/us, Small Signal Bandwidth=24MHz, V Span Max=6V, V Span Min=2.7V
U2_c1 U2_c2 U2_c3: library part CMP-0944-00099-2, "Precision, 200-uA Supply Current, 36-V Supply Instrumentation Amplifier, -40 to 125 degC, 8-pin SON (DRG8), Green (RoHS & no Sb/Br)", Input Bias Current (+/-)(Max)(nA)=65, Manufacturer="Texas Instruments", Quiescent Current (+/-)(Typ)(mA)=0.2, CMRR(Min)(dB)=84, Code_JEDEC=MO-229, ComponentLink1Description="Manufacturer URL", ComponentLink1URL=http://www.ti.com/, ComponentLink2Description=Datasheet, ComponentLink2URL=http://www.ti.com/general/docs/lit/getliterature.tsp?genericPartNumber=INA826&fileType=pdf, ComponentLink3Description="Package Specification", ComponentLink3URL=http://www.ti.com/litv/pdf/mpds151b, DatasheetVersion=SBOS562E, Eco-Plan="Green (RoHS & no Sb/Br)", Gain(V/V)="1 to 1000", Input Offset (+/-)(Max)(uV)=150, Input Offset Drift (+/-)(Max)(uV/Degrees Celsius)=2, Mounting Technology="Surface Mount", Noise at 1kHz(Typ)(nV/rt(Hz))=18, Non-Linearity (+/-)(Max)(%)=0.0005, Number of Channels=1, Output Offset (+/-)(Max)(uV)=700, Output Offset Drift (+/-)(Max)(uV/Degrees Celsius)=10, PackageDescription="8-Pin Plastic Small Outline, Body 3 x 3 mm, Pitch 0.5 mm", PackageReference=DRG0008A, PackageVersion="4205379/C, 12/2010", PartNumber=INA826AIDRGT, SubFamily="Single Supply", Vs(Max)(V)=36, Vs(Min)(V)=2.7
U4_c1 U4_c2 U4_c3: "40-ns, Micropower Comparator", Supplier Part Number 1=296-36750-1-ND, Supplier 1=Digi-Key
U5: library part CMP-0778-00149-3, "Quadruple 2-Input Exclusive-OR Gates, PW0014A, LARGE T&R", F @ Nom Voltage(Max)(Mhz)=70, Generic Part Number=SN74LV86A, ICC @ Nom Voltage(Max)(mA)=0.02, Manufacturer="Texas Instruments", Operating Temperature Range(C)="-40 to 125,-40 to 85", Rating=Catalog, tpd @ Nom Voltage(Max)(ns)=21,13,8, Voltage(Nom)(V)=2.5,3.3,5, Bits(#)=4, DatasheetVersion=SCLS392G, Input Type=TTL, Output Drive (IOL/IOH)(Max)(mA)=50/-50, Output Type=TTL, PackageReference=PW0014A, Schmitt Trigger=No, Technology Family=LV-A, VCC(Max)(V)=5.5, VCC(Min)(V)=2
U6: library part CMP-0798-00103-1, "CMOS Low Voltage 4 Ohm, 4-Channel Multiplexer, -40 to 85 degC, 10-pin SOP (RM-10), Tube", Manufacturer="Analog Devices", Bandwidth (Hz)=200M, Code_JEDEC=MO-187-BA, ComponentLink1Description="Manufacturer URL", ComponentLink1URL=http://www.analog.com/en/index.html, ComponentLink2Description=Datasheet, ComponentLink2URL=http://www.analog.com/static/imported-files/data_sheets/ADG704.pdf, ComponentLink3Description="Package Specification", ComponentLink3URL=http://www.analog.com/static/imported-files/packages/PKG_PDF/MSOP%28RM%29/RM_10.pdf, DatasheetVersion="Rev. A", Max Analog Signal Range="0 to Vdd", Mounting Technology="Surface Mount", PackageDescription="10-Pin Mini Small Outline Package, Body 3 x 3 mm, Pitch 0.5 mm", PackageReference=RM-10, PackageVersion=Aug-05, Packing=Tube, PartNumber=ADG704BRMZ, Ron (ohms)=4, Supply V Guar Performance="Single_(+3.3V), Single_(+3V), Single_(+5V)"
U7: library part CMP-2000-07589-1, "High Performance 6-Axis MEMS MotionTracking(TM) Device, 1.71 to 3.45 V, -40 to 85 degC, 16-Pin LGA, RoHS", Manufacturer=InvenSense, Max Operating Temperature=85degC, Min Operating Temperature=-40degC, Package Description="16-Pin Land Grid Array, Body 3 x 3 mm, Pitch 0.5 mm", Package Reference=I62-16, Supplier Part Number 1=1428-1060-1-ND, Datasheet URL=http://www.invensense.com/wp-content/uploads/2016/10/DS-000176-ICM-20602-v1.0.pdf, Datasheet Version="Rev. 1.0, 10/2016", Manufacturer URL=http://www.invensense.com/, Mounting Technology=SurfaceMount, Output Type=I2C, RoHSCompliant=True, Sensor Type=Temperature, Supplier 1=Digi-Key
U8: library part CMP-0078-00009-3, "USB UART Asynchronous Serial Data Transfer Chip, 32-pin QFN, Tape and Reel", Manufacturer=FTDI, ComponentLink1Description="Manufacturer URL", ComponentLink1URL=http://www.ftdichip.com/, ComponentLink2Description=Datasheet, ComponentLink2URL=http://www.ftdichip.com/Support/Documents/DataSheets/ICs/DS_FT232R.pdf, DatasheetVersion="ver 2.10, Mar-2012", PackageDescription="32-Pin Quad Flat No-Lead 0.5 mm Pitch, Pullback, 3.2 x 3.2 mm Exposed Pad", PackageReference=PQFN5X5-32, PackageVersion=Mar-12, PartNumber=FT232RQ-Reel, RevisionNote="DatasheetVersion updated to 2.10 Mar-2012"
U9: library part ADA4622-1ARJZ, "30 V, 8 MHz, Low Bias Current, / Single-Supply, RRO, Precision Op Amps", Supplier Part Number 1=ADA4084-1ARJZ-R7CT-ND, ComponentLink1Description=Datasheet, ComponentLink1URL=http://www.analog.com/media/en/technical-documentation/data-sheets/ada4622-1-4622-2-4622-4.pdf, Supplier 1=Digi-Key
U10: "3.3V Ultra low power Voltage Regulator", Supplier Part Number 1=296-39474-1-ND, Supplier 1=Digi-Key
U11: library part CMP-0784-00363-1, "Micropower, High Accuracy Voltage Reference, 1.2 V Output, 2.3 to 5.5 V Supply, Industrial, 6-pin SOT23 (RJ-6), Reel", Manufacturer="Analog Devices", Operating Temp Range="-40 to 125 degC", Code_JEDEC=MO-178-AB, ComponentLink1Description="Manufacturer URL", ComponentLink1URL=http://www.analog.com/en/index.html, ComponentLink2Description=Datasheet, ComponentLink2URL=http://www.analog.com/static/imported-files/data_sheets/ADR3412_ADR3420_ADR3425_ADR3430_ADR3433_ADR3440_ADR3450.pdf, ComponentLink3Description="Package Specification", ComponentLink3URL=http://www.analog.com/static/imported-files/packages/PKG_PDF/SOT-23(RJ)/RJ_6.pdf, ComponentLink4Description="URL Link1", ComponentLink4URL="Product URL:http://www.analog.com/en/special-linear-functions/voltage-references/adr3412/products/product.html", DatasheetVersion="Rev. B", Max V Supply (V)=5.5, Min V Supply (V)=2.3, Mounting Technology="Surface Mount", PackageDescription="6-Pin Small Outline Transistor Package, Body 2.9 x 1.6 mm, Pitch 0.95 mm", PackageReference=RJ-6, PackageVersion="121608-A, 12/2008", Packing=Reel, PartNumber=ADR3412ARJZ-R2, Ref Out TC (ppm/C)=8, Vout=1.2V
J1_c1 J1_c2 J1_c3 J2_c1 J2_c2 J2_c3 J3_c1 J3_c2 J3_c3 J4_c1 J4_c2 J4_c3 J5_c1 J5_c2 J5_c3: LatestRevisionDate=17-Jul-2002, LatestRevisionNote="Re-released for DXP Platform.", Publisher="Altium Limited"
L1: ComponentLink1Description=Premo, ComponentLink1URL=https://www.grupopremo.com/618-3dcc08-3d-coil-cube-receiver-sensor-for-vr-magnetic-tracking-system-165x148x118-mm-

## Via types
v1: diameter 25, hole 8, Top Layer to Bottom Layer, 69 vias
v2: diameter 24, hole 12, Top Layer to Bottom Layer, 15 vias
v3: diameter 25, hole 8, Top Layer to Bottom Layer, tented top, 9 vias
v4: diameter 25, hole 8, Top Layer to Int1 (GND), 1 vias

## Nets (pads, with @x,y where several pads share a name; then routed paths per layer and width w, separated by ;. In a path a pad name is that pad's centre, name@x,y a point inside that pad or via, vN(x,y) a via of type N, cw(c..) or ccw(c..) an arc to the next point about the centre after c; other vN are vias at no path point)
3V3: C17.2 Rio2.2 U8.16 | length 432.4
  Top Layer w8: C17.2@2828.69,1426 2829.69,1427 2866.31,1427 Rio2.2@2867.31,1428 2865.96,1429.36 2865.96,1452.64 v2(2864.6,1454)
  Bottom Layer w8: v2(2864.6,1454) 2882.6,1436 2970.23,1436 3055.89,1521.66 v1(3055.89,1653.23)
+5: C3.2 C4.2 FB1.1 Rbt1.2 U8.19 | length 1239.8
  Top Layer w8: Rbt1.2@2963,1337.37 2998.63,1337.37 3014,1322 3096,1322 v2(3211,1437) ; U8.19@2992.43,1653.35 2992.43,1675.57 2985,1683 2985,1702.37 C3.2@2982.37,1705 C4.2@3022,1705 3022,1706.97 3048.15,1733.11 3055,1733.11 3063.89,1742 3091,1742 3091,1862 3129,1900 FB1.1@3129,1933.18 3162.82,1933.18 v2(3211,1885)
  Bottom Layer w8: v2(3211,1437) v2(3211,1885)
c1_dig: U4_c1.1 U5.2 U6.2 | length 1202.6
  Top Layer w8: U4_c1.1@2076.99,1804.72 U4_c1.1@2084.87,1804.72 2085.22,1804.36 2127.15,1804.36 2151,1780.51 2212.03,1780.51 2233,1801.48 2233,1821 2216,1838 2216,1943.9 2246.05,1973.95 2306.05,1973.95 2318,1962 2365,1962 v1(2418,1909) 2503.84,1909 2507.17,1912.34 U5.2@2542.8,1912.34 ; v1(2823,1858) 2826.25,1854.75 2826.25,1842.2 2851.76,1816.69 U6.2@2881.29,1816.69
  Bottom Layer w8: v1@2418,1907 v1(2418,1909) 2772,1909 v1(2823,1858)
c1_pwm: Cp1.2 Rp1.2 U3.27 | length 303.6
  Top Layer w8: Rp1.2@2428.31,1869 2395.35,1869 2373.5,1847.15 2373.5,1826.85 2448.7,1751.65 2493.99,1751.65 ; Cp1.2@2518,1691.31 2519.97,1691.31 2544.02,1667.26 U3.27@2544.02,1635.45
c2_dig: U4_c2.1 U5.5 U6.9 | length 1485.8
  Top Layer w8: U4_c2.1@2084.87,1494.72 2081.67,1497.92 2084.87,1501.12 2084.87,1517.13 2060,1542 2060,1568 2066,1574 2205.31,1574 2211.64,1580.32 2211.64,1620.84 2190,1642.48 2190,1665 2204,1679 v1(2329,1679) ; v1(2398,1837) 2398.72,1836.28 2542.08,1836.28 U5.5@2542.8,1835.57 2545.23,1838 v1(2595,1838) ; v1(2649,1866) 2649,1899.56 2716.44,1967 2891,1967 2908,1950 2908,1910 2952,1866 2952,1858.38 2953.06,1857.33 2953.06,1850.25 2986.62,1816.69 U6.9@3042.71,1816.69
  Bottom Layer w8: v1(2329,1679) 2336,1679 2398,1741 v1(2398,1837) ; v1(2595,1838) 2621,1838 v1(2649,1866)
  other v1: 2136,1499
c2_pwm: Cp2.2 Rp2.2 U3.26 | length 180.9
  Top Layer w8: Rp2.2@2428.31,1807 2428.31,1805.03 2469.69,1763.65 2498.96,1763.65 ; 2538.76,1711.58 2559.03,1691.31 2562.97,1691.31 Cp2.2@2561,1691.31 ; Cp2.2@2561.98,1691.31 2563.36,1689.94 2563.36,1635.8 U3.26@2563.71,1635.45
c3_dig: U4_c3.1 U5.10 U6.4 | length 1361.3
  Top Layer w8: U4_c3.1@2068.55,1176.91 2077.06,1176.91 U4_c3.1@2084.87,1184.72 2084,1185.58 2084,1201 2063,1222 2063,1246.97 2079.03,1263 2202,1263 2224,1285 v1(2224,1351) ; v1(2687.86,1843) 2691.11,1839.75 2709.25,1839.75 2713.43,1835.57 U5.10@2767.2,1835.57 2771.08,1831.69 2797.39,1831.69 2851.76,1777.32 U6.4@2881.29,1777.32
  Bottom Layer w8: v1(2224,1351) 2294,1351 2374,1431 2374,1669 2425,1720 2459.68,1720 2549.68,1810 2654.86,1810 v1(2687.86,1843)
c3_pwm: Cp3.2 Rp3.2 U3.25 | length 33.8
  Top Layer w8: U3.25@2583.39,1635.45 2583.39,1666.47 ; Cp3.2@2604,1691.31 Cp3.2@2604.58,1691.9 ; Rp3.2@2643.63,1729.66 Rp3.2@2643.63,1731.63
ch1+: C6_c1.1 J1_c1.1 L1.1 | length 963.3
  Top Layer w8: J1_c1.1@1372,1962.32 1379,1969.32 C6_c1.1@1422,1969.32
  Top Layer w10: L1.1@534.32,1786.73 709.91,1962.32 J1_c1.1@1372,1962.32
ch1-: C7_c1.1 J2_c1.1 L1.2 | length 1002.6
  Top Layer w8: J2_c1.1@1372,1722.32 1379.68,1714.63 C7_c1.1@1422,1714.63
  Top Layer w10: L1.2@534.32,1707.99 635.99,1707.99 778,1850 1244.32,1850 J2_c1.1@1372,1722.32
ch2+: C6_c2.1 J1_c2.1 L1.3 | length 1002.5
  Top Layer w8: J1_c2.1@1372,1652.32 1379,1659.32 C6_c2.1@1422,1659.32
  Top Layer w10: L1.3@534.32,1382.01 563.85,1382.01 834.16,1652.32 J1_c2.1@1372,1652.32
ch2-: C7_c2.1 J2_c2.1 L1.4 | length 979.7
  Top Layer w8: J2_c2.1@1372,1412.32 1379.68,1404.63 C7_c2.1@1422,1404.63
  Top Layer w10: L1.4@534.32,1303.27 616.27,1303.27 778,1465 1165.32,1465 1218,1412.32 J2_c2.1@1372,1412.32
ch3+: C6_c3.1 J1_c3.1 L1.5 | length 441.4
  Top Layer w8: J1_c3.1@1372,1342.32 1379,1349.32 C6_c3.1@1422,1349.32
  Top Layer w10: L1.5@999.68,1303.27 1271.95,1303.27 1311,1342.32 J1_c3.1@1372,1342.32
ch3-: C7_c3.1 J2_c3.1 L1.6 | length 870.8
  Top Layer w8: J2_c3.1@1372,1102.32 1379.68,1094.63 C7_c3.1@1422,1094.63
  Top Layer w10: L1.6@999.68,1382.01 914.01,1382.01 883,1351 883,1187 967.68,1102.32 J2_c3.1@1372,1102.32
CLK: U3.22 U7.2 | length 138.3
  Top Layer w8: U3.22@2608,1571.47 2608.33,1571.14 v1(2651.5,1571.14) ; 2716.64,1624.69 U7.2@2735.77,1624.69
  Bottom Layer w8: v1(2651.5,1571.14) 2703,1622.65 v1(2703,1625.32)
coil_amp_c1: J3_c1.1 R1A_c1.1 U2_c1.7 | length 135.9
  Top Layer w8: U2_c1.7@1520.15,1851.16 1569.84,1851.16 J3_c1.1@1576,1857.32 1612.47,1893.78 1612.47,1911.47 R1A_c1.1@1618.32,1917.32
coil_amp_c2: J3_c2.1 R1A_c2.1 U2_c2.7 | length 135.9
  Top Layer w8: U2_c2.7@1520.15,1541.16 1569.84,1541.16 J3_c2.1@1576,1547.32 1612.47,1583.78 1612.47,1601.47 R1A_c2.1@1618.32,1607.32
coil_amp_c3: J3_c3.1 R1A_c3.1 U2_c3.7 | length 135.9
  Top Layer w8: U2_c3.7@1520.15,1231.16 1569.84,1231.16 J3_c3.1@1576,1237.32 1612.47,1273.78 1612.47,1291.47 R1A_c3.1@1618.32,1297.32
CS_IMU: U3.21 U7.5 | length 136.9
  Top Layer w6: U3.21@2621.78,1551.79 2622.82,1551.79 2626.97,1547.64 2670.74,1547.64 2688.73,1565.63 U7.5@2735.77,1565.63
  Top Layer w8: U3.21@2608,1551.79 U3.21@2621.78,1551.79
DM: J6.2 U8.15 | length 323.8
  Top Layer w8: U8.15@3045.57,1619.88 3068,1619.88 3081,1632.88 3081,1684.82 3089.25,1693.07 3171.93,1693.07 3178,1687 3178,1629.99 3152.31,1604.3 3123.02,1604.3 J6.2@3119.14,1600.43
DP: J6.3 U8.14 | length 89.7
  Top Layer w8: U8.14@3045.57,1600.2 3045.79,1600.42 3067.42,1600.42 3083.3,1616.3 3090.72,1616.3 3100.44,1626.02 J6.3@3119.14,1626.02 J6.3@3123.02,1622.14